# Altium PCB PCB.PcbDoc
Units mm, origin at the board's own origin, x right, y up, seen from the top; angles counter-clockwise.
Board outline 100 x 70 mm, 2 copper layers (Top Layer, Bottom Layer); 45 components, 48 nets, 152 pads, 0 vias.
Unrouted connection lines stored in the file: 77.
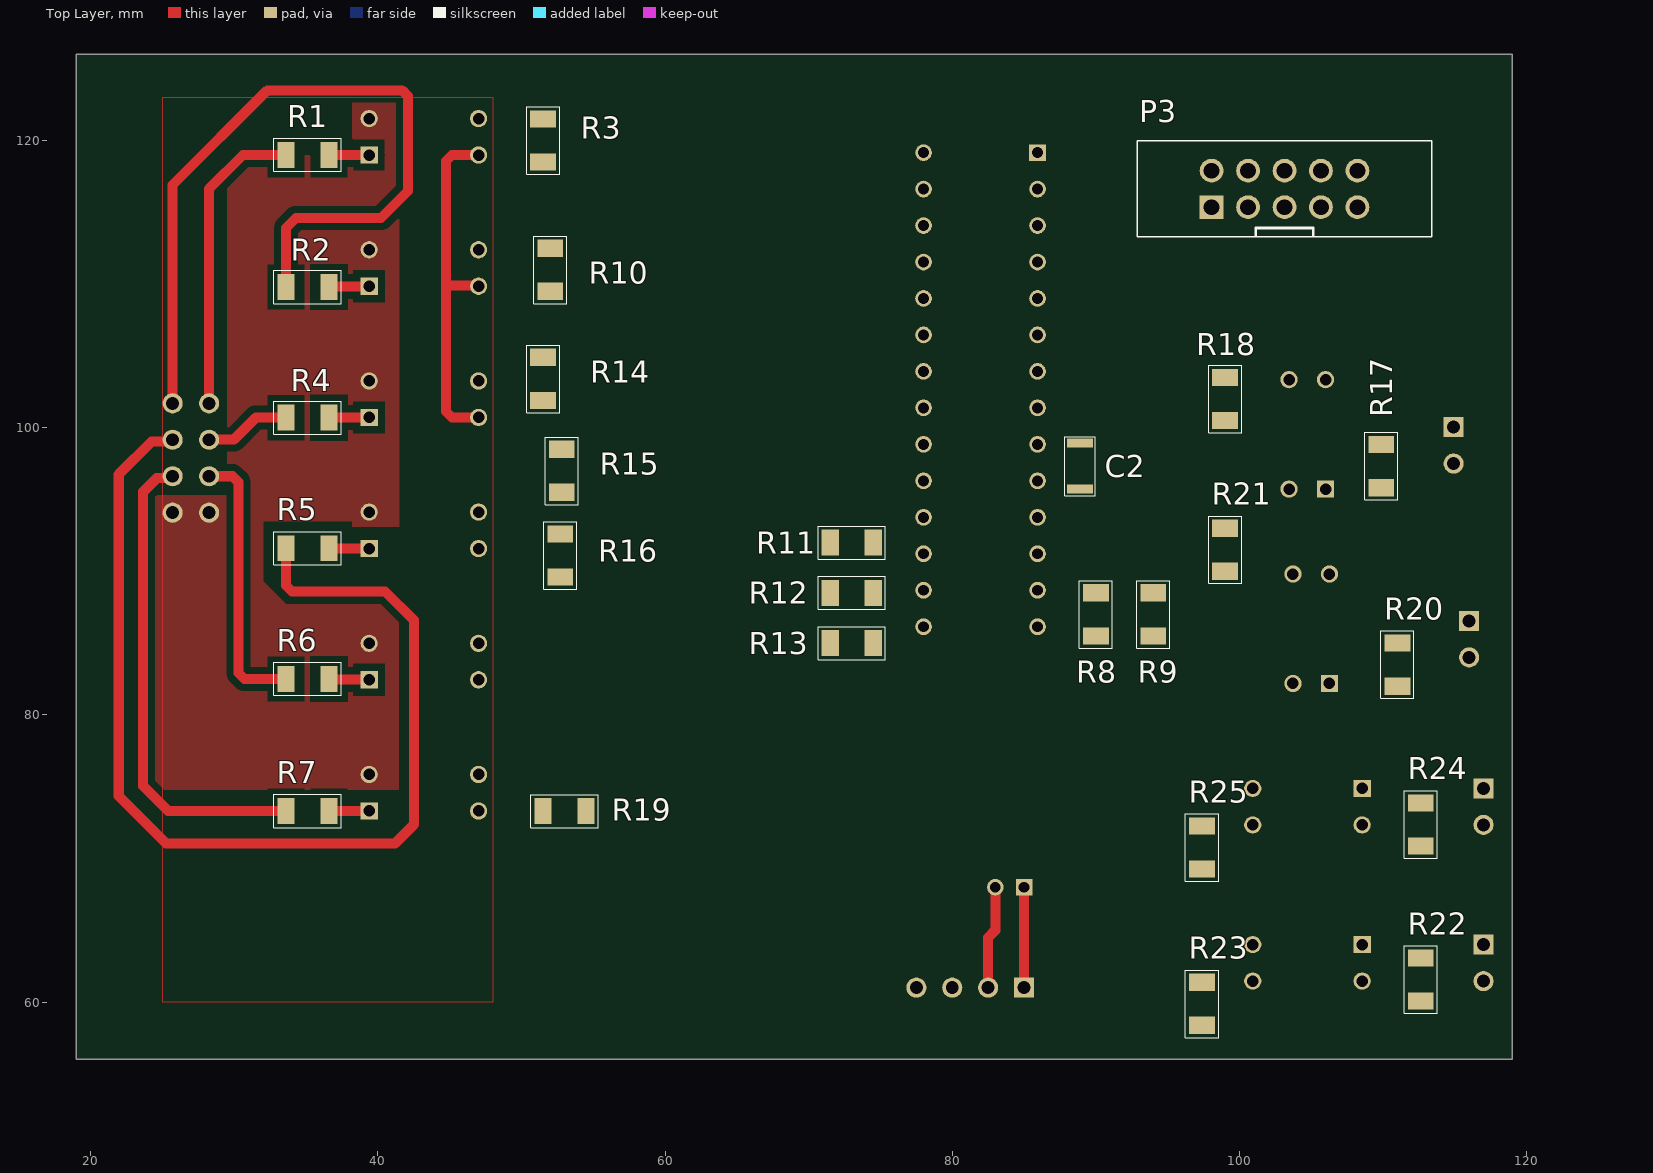
[diagram p0: Top Layer view]
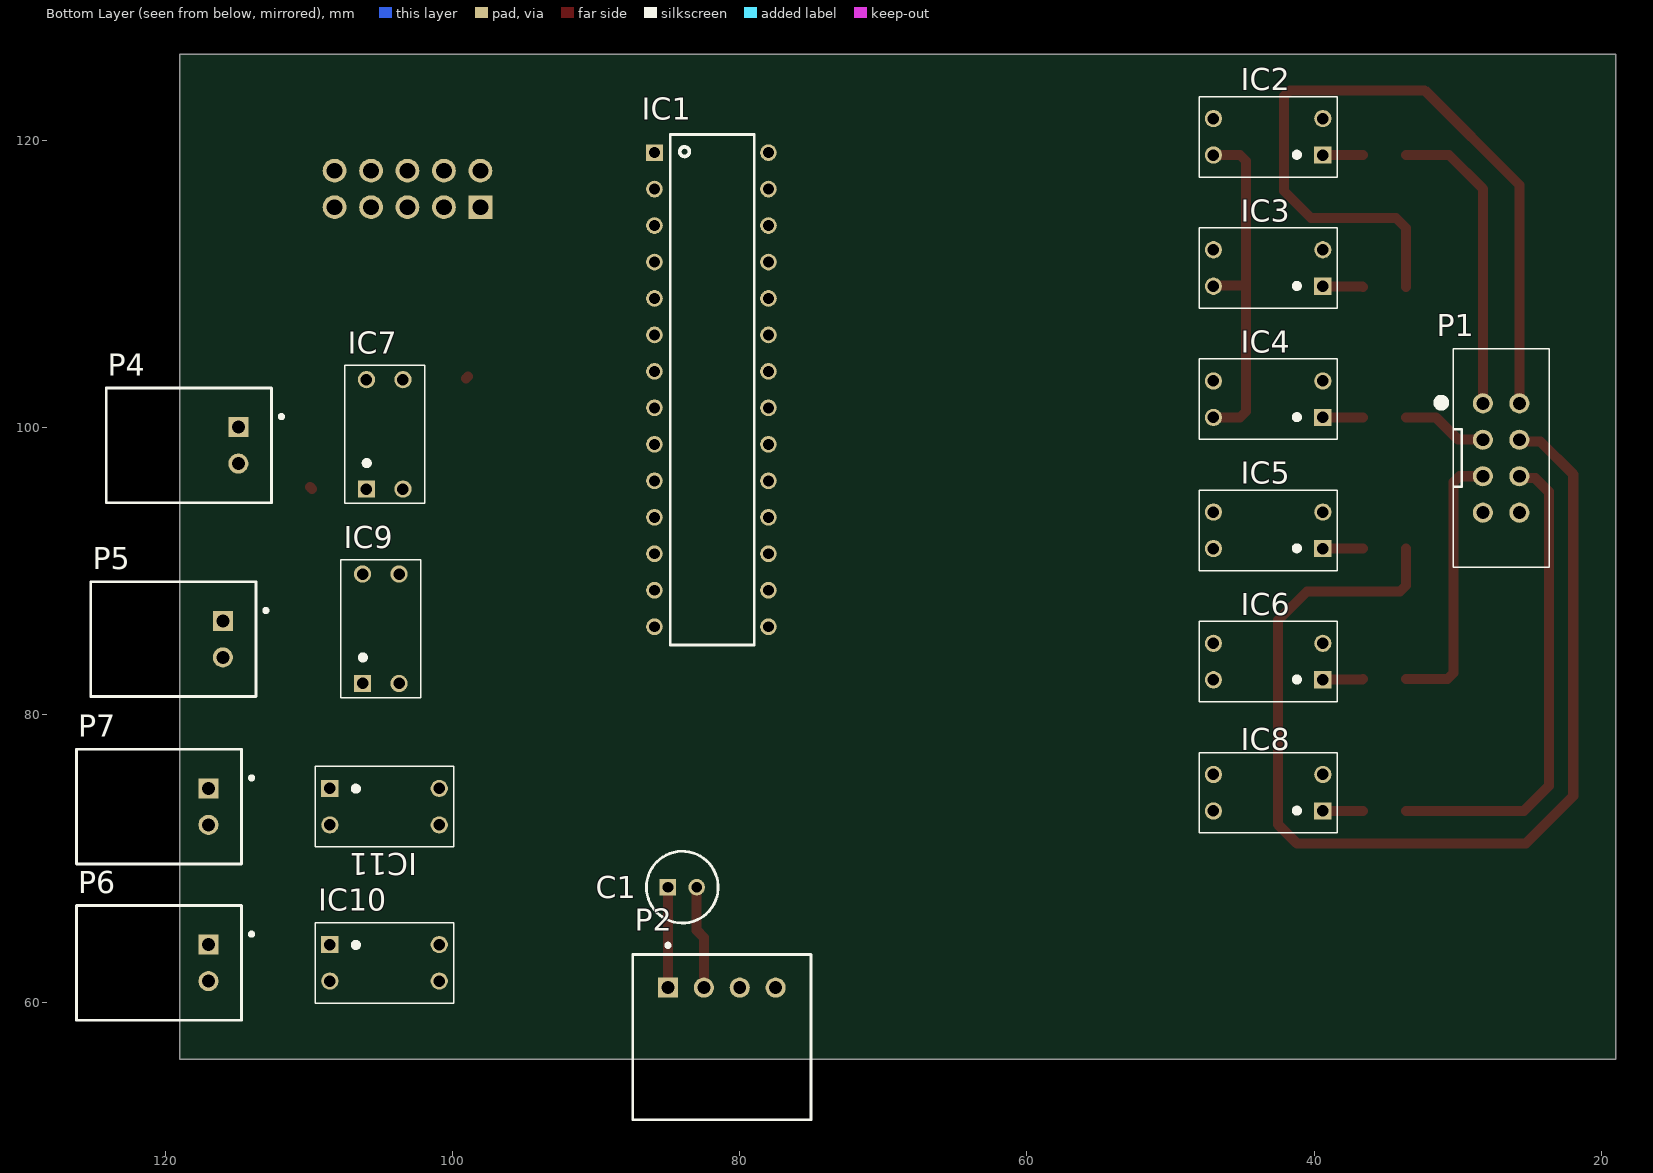
[diagram p1: Bottom Layer view, seen from below]

## Layer stack, top to bottom
Top Solder: solder mask 0.0102, Solder Resist, Dk 3.5
Top Layer: signal copper 0.0356
Dielectric 1: dielectric 0.32, FR-4, Dk 4.8
Bottom Layer: signal copper 0.0356
Bottom Solder: solder mask 0.0102, Solder Resist, Dk 3.5

## Board outline
19,56 119,56 119,126 19,126

## Design rules (kind name [scope] priority, off if disabled: settings)
Clearance [All] p1: gap=1 ignorepadtopadclearanceinfootprint=FALSE except(0.5: Arc-Fill Arc-Poly Arc-Region Track-Fill Track-Poly Track-Region THPad-THPad THPad-Fill THPad-Poly THPad-Region Via-Via Via-Fill Via-Poly Via-Region Fill-Fill Fill-Poly Fill-Region Poly-Poly Poly-Region Region-Region; 0.7: SMDPad-Fill SMDPad-Poly SMDPad-Region Fill-Hole Poly-Hole Region-Hole)
ComponentClearance [All] p1: gap=1 collisioncheckmode=3 verticalgap=0.254 showdistances=FALSE
PolygonConnect [All] p1: thpad.connectstyle=Direct thpad.reliefconductorwidth=0.254 thpad.reliefentries=4 thpad.polygonreliefangle="90 Angle" thpad.airgapwidth=0.254 smdpad.connectstyle=Relief smdpad.reliefconductorwidth=0.254 smdpad.reliefentries=4 smdpad.polygonreliefangle="90 Angle" smdpad.airgapwidth=0.254 via.connectstyle=Relief via.reliefconductorwidth=0.254 via.reliefentries=4 via.polygonreliefangle="90 Angle" via.airgapwidth=0.254
RoutingVias [All] p1: holewidth=0.711 width=1.27 viastyle="Through Hole" minholewidth=0.711 minwidth=1.27 maxholewidth=0.711 maxwidth=1.27
SolderMaskExpansion [All] p1: expansion=0.102 istentingtop=FALSE
Width [All] p1: maxlimit=0.7 minlimit=0.7 preferedwidth=0.7
29 further rules are at their usual default settings.

## Components (designator, comment, footprint, x,y, rotation, side; value= is the part's Value field where it differs from the comment)
C1 "EEU-FR1V330" CAPPRD200W55D500H1250 85,68 r180 bottom
C2 "C3216C0G1H683J160AE" CAPC3216X180N 88.887,97.325 r90 top
IC1 "MCP23017-E_SP" DIP794W56P254L3486H508Q28N 81.969,102.65 r180 bottom
IC2 "LTV-817-B" DIP762W60P254L460H420Q4N 43.201,120.258 r0 bottom
IC3 "LTV-817-B" DIP762W60P254L460H420Q4N 43.201,111.122 r0 bottom
IC4 "LTV-817-B" DIP762W60P254L460H420Q4N 43.201,101.986 r0 bottom
IC5 "LTV-817-B" DIP762W60P254L460H420Q4N 43.201,92.85 r0 bottom
IC6 "LTV-817-B" DIP762W60P254L460H420Q4N 43.201,83.714 r0 bottom
IC7 "LTV-817-B" DIP762W60P254L460H420Q4N 104.727,99.533 r90 bottom
IC8 "LTV-817-B" DIP762W60P254L460H420Q4N 43.201,74.578 r0 bottom
IC9 "LTV-817-B" DIP762W60P254L460H420Q4N 105,86 r90 bottom
IC10 "LTV-817-B" DIP762W60P254L460H420Q4N 104.738,62.73 r180 bottom
IC11 "LTV-817-B" DIP762W60P254L460H420Q4N 104.738,73.609 r180 bottom
P1 "IDC-8pin" IDC-8PIN 26.97,97.89 r270 bottom
P2 "S4B-XH-A(LF)(SN)" JST-S4B-XH-A(LF)(SN)_V 81.25,61 r180 bottom
P3 "IDC-10pin" IDC-10PIN 103.14,116.65 r0 top
P4 "2-pin_connector" 2-pin_connector 114.922,98.773 r270 bottom
P5 "2-pin_connector" 2-pin_connector 116,85.27 r270 bottom
P6 "2-pin_connector" 2-pin_connector 117,62.73 r270 bottom
P7 "2-pin_connector" 2-pin_connector 117,73.609 r270 bottom
R1 "CR1206-FW-1504ELF" RESC3216X75N 35.1,119 r180 top
R2 "CR1206-FW-1504ELF" RESC3216X75N 35.1,109.8 r180 top
R3 "CR1206-FW-1504ELF" RESC3216X75N 51.5,120 r270 top
R4 "CR1206-FW-1504ELF" RESC3216X75N 35.1,100.7 r180 top
R5 "CR1206-FW-1504ELF" RESC3216X75N 35.1,91.6 r180 top
R6 "CR1206-FW-1504ELF" RESC3216X75N 35.1,82.5 r180 top
R7 "CR1206-FW-1504ELF" RESC3216X75N 35.1,73.305 r180 top
R8 "CR1206-FW-1504ELF" RESC3216X75N 90,87 r270 top
R9 "CR1206-FW-1504ELF" RESC3216X75N 94,87 r270 top
R10 "CR1206-FW-1504ELF" RESC3216X75N 52,111 r270 top
R11 "CR1206-FW-1504ELF" RESC3216X75N 73,92 r0 top
R12 "CR1206-FW-1504ELF" RESC3216X75N 73,88.5 r0 top
R13 "CR1206-FW-1504ELF" RESC3216X75N 73,85 r0 top
R14 "CR1206-FW-1504ELF" RESC3216X75N 51.5,103.4 r270 top
R15 "CR1206-FW-1504ELF" RESC3216X75N 52.8,97 r270 top
R16 "CR1206-FW-1504ELF" RESC3216X75N 52.7,91.1 r270 top
R17 "CR1206-FW-1504ELF" RESC3216X75N 109.873,97.325 r270 top
R18 "CR1206-FW-1504ELF" RESC3216X75N 99,102 r270 top
R19 "CR1206-FW-1504ELF" RESC3216X75N 53,73.3 r0 top
R20 "CR1206-FW-1504ELF" RESC3216X75N 111,83.5 r270 top
R21 "CR1206-FW-1504ELF" RESC3216X75N 99,91.5 r90 top
R22 "CR1206-FW-1504ELF" RESC3216X75N 112.628,61.568 r270 top
R23 "CR1206-FW-1504ELF" RESC3216X75N 97.393,59.879 r270 top
R24 "CR1206-FW-1504ELF" RESC3216X75N 112.628,72.372 r270 top
R25 "CR1206-FW-1504ELF" RESC3216X75N 97.393,70.761 r270 top

## Footprints (in the part's own frame and the unit in brackets; to place one, negate y for a bottom-side part, rotate by r counter-clockwise, add the part's x,y. Pads: shape width x height; smd on the part's side, far side on the other; paste and mask are expansions set on the pad)
2-pin_connector [mm] "Шаг 2.54мм"
  rect 1.4x1.4 hole 0.9: 1(-1.27,0)
  round 1.4 hole 0.9: 2(1.27,0)
  silkscreen extent -4,-9.2 4,3.12
CAPC3216X180N [mm]
  rect 0.62x1.82 smd: 1(-1.6,0) 2(1.6,0)
  silkscreen extent -2.06,-1.06 2.06,1.06, body extent -1.6,-0.8 1.6,0.8, height 1.8
CAPPRD200W55D500H1250 [mm]
  rect 1.15x1.15 hole 0.75: 1(0,0)
  round 1.15 hole 0.75: 2(2,0)
  silkscreen extent -1.5,-2.5 3.5,2.5, body extent -1.75,-2.75 3.75,2.75, height 12.5
DIP762W60P254L460H420Q4N [mm]
  rect 1.2x1.2 hole 0.8: 1(-3.81,1.27)
  round 1.2 hole 0.8: 2(-3.81,-1.27) 3(3.81,-1.27) 4(3.81,1.27)
  silkscreen extent -4.81,-2.8 4.81,2.8, body extent -3.96,-2.3 3.96,2.3, height 4.2
DIP794W56P254L3486H508Q28N [mm]
  rect 1.159x1.159 hole 0.759: 1(-3.969,16.51)
  round 1.159 hole 0.759: 2(-3.969,13.97) 3(-3.969,11.43) 4(-3.969,8.89) 5(-3.969,6.35) 6(-3.969,3.81) 7(-3.969,1.27) 8(-3.969,-1.27) 9(-3.969,-3.81) 10(-3.969,-6.35) 11(-3.969,-8.89) 12(-3.969,-11.43) 13(-3.969,-13.97) 14(-3.969,-16.51) 15(3.969,-16.51) 16(3.969,-13.97) 17(3.969,-11.43) 18(3.969,-8.89) 19(3.969,-6.35) 20(3.969,-3.81) 21(3.969,-1.27) 22(3.969,1.27) 23(3.969,3.81) 24(3.969,6.35) 25(3.969,8.89) 26(3.969,11.43) 27(3.969,13.97) 28(3.969,16.51)
  silkscreen extent -2.88,-17.78 2.98,17.78, body extent -4.11,-17.43 4.11,17.43, height 5.08
IDC-8PIN [mm]
  round 1.4 hole 0.9: 1(-3.81,-1.27) 2(-3.81,1.27) 3(-1.27,-1.27) 4(-1.27,1.27) 5(1.27,-1.27) 6(1.27,1.27) 7(3.81,-1.27) 8(3.81,1.27)
  silkscreen extent -7.62,-4.38 7.62,3.35
IDC-10PIN [mm]
  rect 1.65x1.65 hole 1.1: 1(-5.08,-1.29)
  round 1.65 hole 1.1: 2(-5.08,1.25) 3(-2.54,-1.29) 4(-2.54,1.25) 5(0,-1.29) 6(0,1.25) 7(2.54,-1.29) 8(2.54,1.25) 9(5.08,-1.29) 10(5.08,1.25)
  silkscreen extent -10.25,-3.35 10.25,3.35
JST-S4B-XH-A(LF)(SN)_V [mm] "Header, 4-Leads, Body 12.4x11.5mm, Pitch 2.5mm"
  rect 1.4x1.4 hole 0.9: 1(-3.75,0)
  round 1.4 hole 0.9: 2(-1.25,0) 3(1.25,0) 4(3.75,0)
  silkscreen extent -6.2,-9.2 6.2,3.08, body extent -6.2,-9.2 6.2,2.3, height 6.15
RESC3216X75N [mm]
  rect 1.2x1.8 smd: 1(-1.5,0) 2(1.5,0)
  silkscreen extent -2.35,-1.15 2.35,1.15, body extent -1.6,-0.8 1.6,0.8, height 0.75

## Part data
C1: "Capacitor Polarised", Manufacturer_Name=Panasonic, Mouser Part Number=667-EEU-FR1V330, Datasheet Link=https://componentsearchengine.com/Datasheets/1/EEU-FR1V330.pdf, Height=12.5mm, Manufacturer_Part_Number=EEU-FR1V330, Mouser Price/Stock=http://www.mouser.com/Search/ProductDetail.aspx?qs=ob%252bdNz2%252bYEhHeC0uCpfxxQ%3d%3d
C2: "Capacitor", Manufacturer_Name=TDK, Mouser Part Number=810-C3216C0G1H683J16, Datasheet Link=https://product.tdk.com/info/en/catalog/datasheets/mlcc_commercial_midvoltage_en.pdf, Height=1.8mm, Manufacturer_Part_Number=C3216C0G1H683J160AE, Mouser Price/Stock=https://www.mouser.co.uk/ProductDetail/TDK/C3216C0G1H683J160AE?qs=P1JMDcb91o7iXP%252BmsCRcbg%3D%3D
IC1: "Integrated Circuit", Arrow Part Number=MCP23017-E/SP, Manufacturer_Name=Microchip, Mouser Part Number=579-MCP23017-E/SP, Arrow Price/Stock=https://www.arrow.com/en/products/mcp23017-esp/microchip-technology, Datasheet Link=http://docs-emea.rs-online.com/webdocs/137e/0900766b8137eed4.pdf, Height=5.08mm, Manufacturer_Part_Number=MCP23017-E/SP, Mouser Price/Stock=https://www.mouser.co.uk/ProductDetail/Microchip-Technology/MCP23017-E-SP?qs=usxtMOJb1RyESXZDw7ia5A%3D%3D
IC2 IC3 IC4 IC5 IC6 IC7 IC8 IC9 IC10 IC11: "Integrated Circuit", Manufacturer_Name=Lite-On, Mouser Part Number=N/A, Arrow Part Number=LTV-817-B, Arrow Price/Stock=https://www.arrow.com/en/products/ltv-817-b/lite-on-technology, Datasheet Link=http://optoelectronics.liteon.com/upload/download/DS-70-96-0016/LTV-8X7%20series%20201610%20.pdf, Height=4.2mm, Manufacturer_Part_Number=LTV-817-B, Mouser Price/Stock=https://www.mouser.co.uk/ProductDetail/Lite-On/LTV-817-B?qs=5Clb0NIqk7HzP4M9tIz87Q%3D%3D
P2: "Male Header, Pitch 2.5 mm, 1 x 4 Position, Height 6.1 mm, Tail Length 3.4 mm, -25 to 85 degC, RoHS, Bulk", ComponentLink1Description="Manufacturer URL", ComponentLink1URL=http://www.jst.com/home2.html, ComponentLink2Description=Datasheet, ComponentLink2URL=http://www.jst-mfg.com/product/pdf/eng/eXH.pdf, DatasheetVersion=May-16, PackageDescription="Male Header, Pitch 2.5 mm, 1 x 4 Position, Height 6.1 mm, Tail Length 3.4 mm", PackageReference=S4B-XH-A(LF)(SN)
R1 R2 R3 R4 R5 R6 R7 R8 R9 R10 R11 R12 R13 R14 R15 R16 R17 R18 R19 R20 R21 R22 R23 R24 R25: "Resistor", Manufacturer_Name=Bourns, Mouser Part Number=652-CR1206FW1504ELF, Arrow Part Number=CR1206-FW-1504ELF, Arrow Price/Stock=https://www.arrow.com/en/products/cr1206-fw-1504elf/bourns, Datasheet Link=http://componentsearchengine.com/Datasheets/1/CR1206-FW-1504ELF.pdf, Height=0.75mm, Manufacturer_Part_Number=CR1206-FW-1504ELF, Mouser Price/Stock=https://www.mouser.co.uk/ProductDetail/Bourns/CR1206-FW-1504ELF/?qs=6oMev5NRZMFfvXkOpYL2%252BA%3D%3D
P1 P3: ComponentLink1Description="Manufacturer URL", ComponentLink2Description=Datasheet, DatasheetVersion=May-16, PackageReference=IDC-8pin
P4 P5 P6 P7: ComponentLink1Description="Manufacturer URL", ComponentLink2Description=Datasheet, DatasheetVersion=May-16

## Nets (pads, with @x,y where several pads share a name; then routed paths per layer and width w, separated by ;. In a path a pad name is that pad's centre, name@x,y a point inside that pad or via, vN(x,y) a via of type N, cw(c..) or ccw(c..) an arc to the next point about the centre after c; other vN are vias at no path point)
+3.3V_RPI: C1.1 C2.2 IC1.9 IC1.18 IC2.4 IC3.4 IC4.4 IC5.4 IC6.4 IC7.4 IC8.4 IC9.4 IC10.4 IC11.4 P2.1 P3.7 P3.8 R8.2 R9.2 | length 31.6
  Top Layer w0.7: IC4.4 45.16,100.716 44.75,101.126 44.75,109.9 ; IC3.4 46.964,109.9 44.75,109.9 ; IC2.4 45.16,118.988 44.75,118.578 44.75,109.9 ; P2.1 C1.1
ADD_SIG_1: IC1.7 IC7.3 R18.1 | length 0.4
  Top Layer w0.7: IC1.7 IC1.7@85.998,103.86 ; R18.1@98.94,103.56 R18.1 R18.1@99.078,103.422 ; IC7.3@103.378,103.422 IC7.3
ADD_SIG_2: IC1.8 IC9.3 R21.1
ADD_SIG_3: IC1.22 IC10.3 R23.1
ADD_SIG_4: IC1.21 IC11.3 R25.1
ARD_SIG_1: IC1.1 P3.1
ARD_SIG_2: IC1.2 P3.2
ARD_SIG_3: IC1.3 P3.3
ARD_SIG_4: IC1.5 P3.4
ARD_SIG_5: IC1.4 P3.5
ARD_SIG_6: IC1.6 P3.6
LAMP_SIG_1: IC1.28 IC2.3 R3.1
LAMP_SIG_2: IC1.27 IC3.3 R10.1
LAMP_SIG_3: IC1.26 IC4.3 R14.1
LAMP_SIG_4: IC1.25 IC5.3 R15.1
LAMP_SIG_5: IC1.24 IC6.3 R16.1
LAMP_SIG_6: IC1.23 IC8.3 R19.1
NetIC1_15: IC1.15 R13.2
NetIC1_16: IC1.16 R12.2
NetIC1_17: IC1.17 R11.2
NetIC2_1: IC2.1 R1.1 | length 2.8
  Top Layer w0.7: R1.1 36.606,118.994 39.386,118.994 IC2.1
NetIC3_1: IC3.1 R2.1 | length 2.8
  Top Layer w0.7: R2.1 36.626,109.826 39.365,109.826 IC3.1
NetIC4_1: IC4.1 R4.1 | length 2.8
  Top Layer w0.7: R4.1 36.608,100.708 39.383,100.708 IC4.1
NetIC5_1: IC5.1 R5.1 | length 2.8
  Top Layer w0.7: R5.1 36.61,91.59 39.382,91.59 IC5.1
NetIC6_1: IC6.1 R6.1 | length 2.8
  Top Layer w0.7: R6.1 36.628,82.472 39.364,82.472 IC6.1
NetIC7_1: IC7.1 R17.2 | length 0.3
  Top Layer w0.7: IC7.1 IC7.1@106.085,95.812 ; R17.2@109.785,95.736 R17.2 R17.2@109.928,95.88
NetIC7_2: IC7.2 P4.2
NetIC8_1: IC8.1 R7.1 | length 2.8
  Top Layer w0.7: R7.1 36.601,73.307 39.39,73.307 IC8.1
NetIC9_1: IC9.1 R20.2
NetIC9_2: IC9.2 P5.2
NetIC10_1: IC10.1 R22.2
NetIC10_2: IC10.2 P6.2
NetIC11_1: IC11.1 R24.2
NetIC11_2: IC11.2 P7.2
NetP1_1: P1.1 R1.2 | length 21.3
  Top Layer w0.7: P1.1 28.24,116.64 30.6,119 R1.2
NetP1_2: P1.2 R2.2 | length 54.8
  Top Layer w0.7: P1.2 25.7,116.9 32.3,123.5 41.69,123.5 42.1,123.09 42.1,116.481 40.219,114.6 34.3,114.6 33.6,113.9 R2.2
NetP1_3: P1.3 R4.2 | length 6
  Top Layer w0.7: P1.3 28.27,99.19 29.99,99.19 31.5,100.7 R4.2
NetP1_4: P1.4 R5.2 | length 76.3
  Top Layer w0.7: P1.4 25.566,99.026 24.226,99.026 21.95,96.75 21.95,74.35 25.245,71.055 41.205,71.055 42.5,72.35 42.5,86.6 40.5,88.6 34.01,88.6 33.6,89.01 R5.2
NetP1_5: P1.5 R6.2 | length 19
  Top Layer w0.7: P1.5 29.88,96.62 30.29,96.21 30.29,82.91 30.7,82.5 R6.2
NetP1_6: P1.6 R7.2 | length 33.7
  Top Layer w0.7: P1.6 25.566,96.486 24.596,96.486 23.65,95.54 23.65,75.054 25.399,73.305 R7.2
NetP4_1: P4.1 R17.1
NetP5_1: P5.1 R20.1
NetP6_1: P6.1 R22.1
NetP7_1: P7.1 R24.1
RPI_GND: C1.2 C2.1 IC1.10 P2.2 P3.9 P3.10 R3.2 R10.2 R11.1 R12.1 R13.1 R14.2 R15.2 R16.2 R18.2 R19.2 R21.2 R23.2 R25.2 | length 7.2
  Top Layer w0.7: P2.2 82.5,64.5 83,65 C1.2
SCL: IC1.12 P2.4 R9.1
SDA: IC1.13 P2.3 R8.1
SIG_GND: IC2.2 IC3.2 IC4.2 IC5.2 IC6.2 IC8.2 P1.7 P1.8
pads on no net: IC1.11 IC1.14 IC1.19 IC1.20

## Polygon pours and split planes (outlines as drawn)
SIG_GND on Top Layer "SIG_GND_L01_P008" (solid, pour order 8): 31.4,112.4
SIG_GND on Top Layer "SIG_GND_L01_P007" (solid, pour order 7): 41.5,87.695 41.405,87.695 33.605,87.695 32,89.3 32,93.5 38.2,93.5 38.2,93.1 41.5,93.1 41.5,122.8 38.2,122.8 38.2,118.995 32.112,118.981 29.5,117.149 29.5,95.3 23.9,95.3 23.9,74.8 41.5,74.8
SIG_GND on Top Layer "SIG_GND_L01_P006" (solid, pour order 6): 73.5,93.9
SIG_GND on Top Layer "SIG_GND_L01_P004" (solid, pour order 4): 71.675,90.4
SIG_GND on Top Layer "NONET_L01_P000" (solid, shelved, pour order 0): 48,123 48,60 25,60 25,123
no net on Top Layer "NONET_L01_P001" (solid, pour order 1): 134,64

## Silkscreen, mask and mechanical layers (free items; w line width, h text height)
Mechanical 15:
  lines w0.2: 21,58 117,58 117,124 21,124 21,58